# Altium PCB HiSpeedADC.PcbDoc
Units mil, origin at the board's own origin, x right, y up, seen from the top; angles counter-clockwise.
Board outline 1590 x 2280 mil, 2 copper layers (Top Layer, Bottom Layer); 47 components, 36 nets, 169 pads, 22 vias.
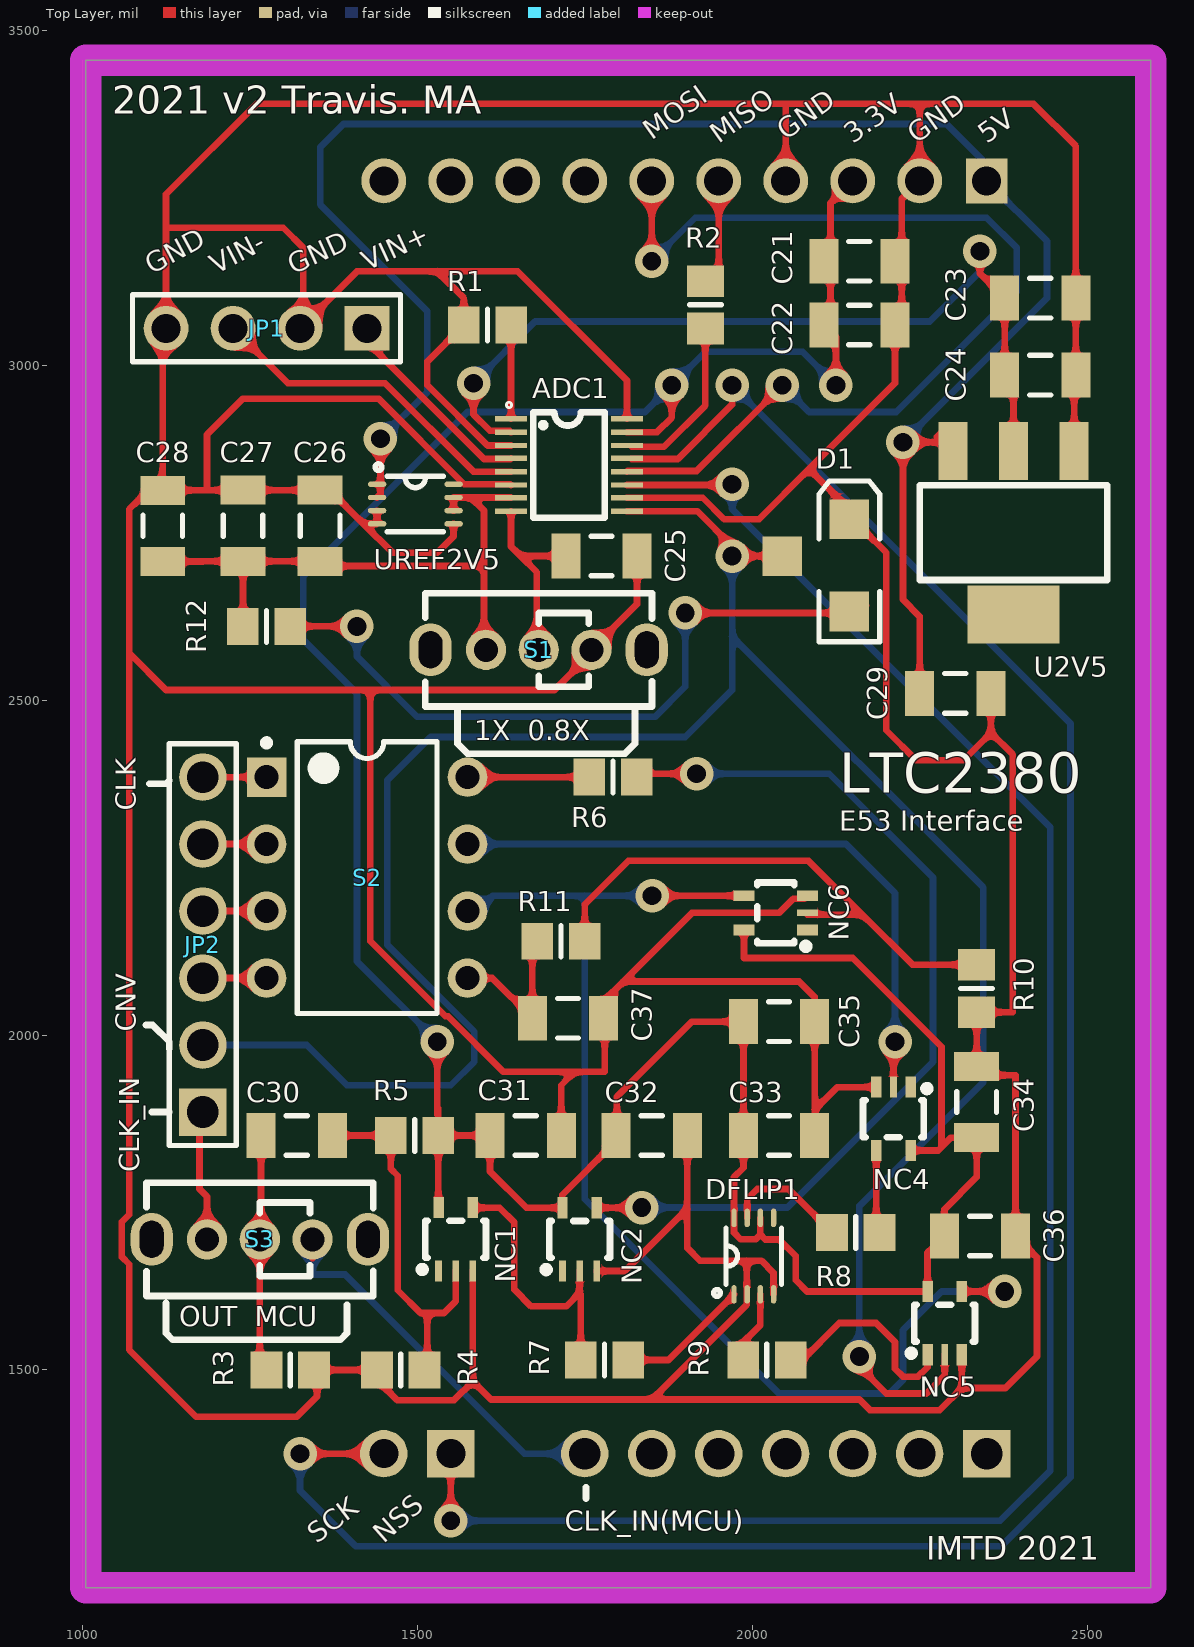
[diagram p0: Top Layer view]
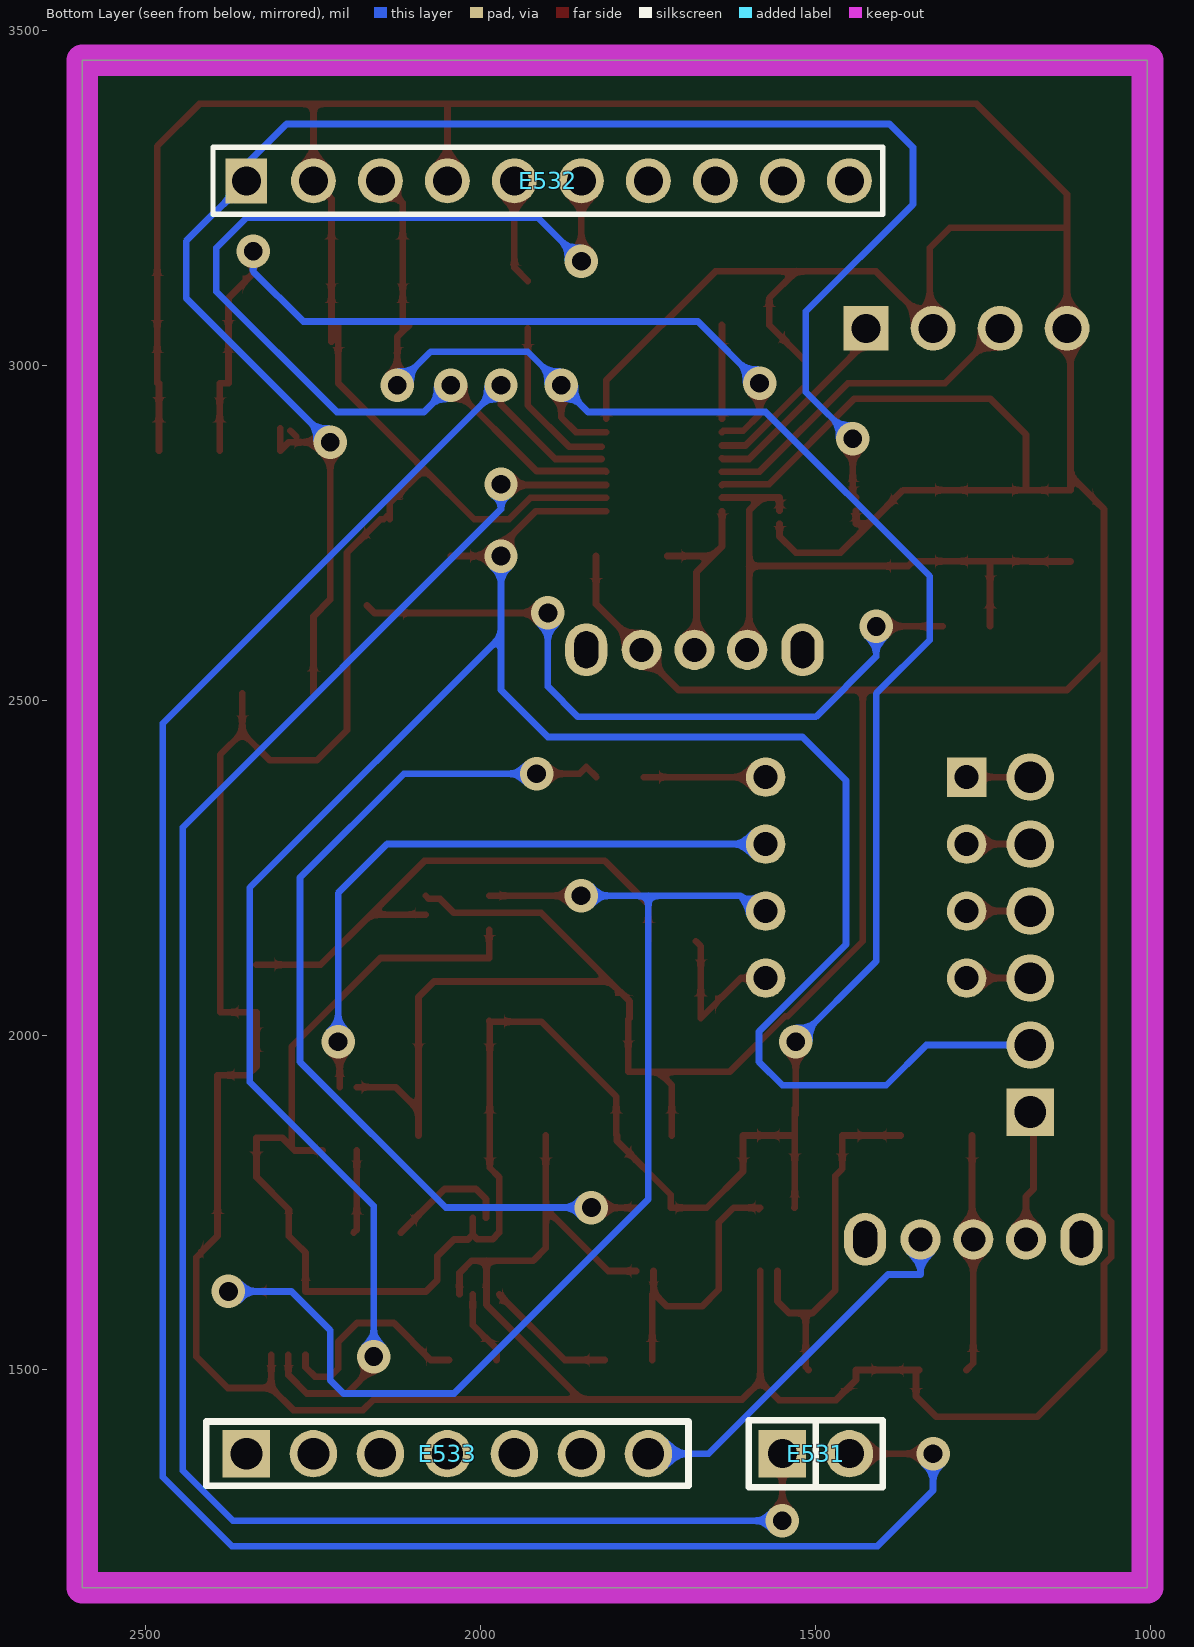
[diagram p1: Bottom Layer view, seen from below]

## Layer stack, top to bottom
Top Solder: solder mask 0.4, Solder Resist, Dk 3.5
Top Layer: signal copper 1.4
Dielectric 1: dielectric 12.6, FR-4, Dk 4.8
Bottom Layer: signal copper 1.4
Bottom Solder: solder mask 0.4, Solder Resist, Dk 3.5

## Board outline
1005,1175 1005,3455 2595,3455 2595,1175

## Design rules (kind name [scope] priority, off if disabled: settings)
Clearance [All] p1: gap=8 ignorepadtopadclearanceinfootprint=TRUE except(0: Via-Hole Fill-Hole Poly-Hole Region-Hole Text-Hole)
PolygonConnect [All] p1: connectstyle=Relief reliefconductorwidth=10 reliefentries=4 polygonreliefangle="90 Angle" airgapwidth=10
RoomDefinition HiSpeedADC [InComponentClass('HiSpeedADC')] p1: confinementstyle=ConfineIn formatcopy=TRUE lockcomponents=FALSE outline 1000,1175 2550,1175 2550,3450 1000,3450
RoutingVias [All] p1: holewidth=28 width=50 viastyle="Through Hole" minholewidth=28 minwidth=50 maxholewidth=28 maxwidth=50
SolderMaskExpansion [All] p1: expansion=4
Width [All] p1: maxlimit=10 minlimit=10 preferedwidth=10
30 further rules are at their usual default settings.

## Components (designator, comment, footprint, x,y, rotation, side; value= is the part's Value field where it differs from the comment)
ADC1 "LTC2380IMS-24#PBF" MSOP-16_L4.0-W3.0-P0.50-LS4.9-BL 1726.5,2855.75 r270 top
C21 "" C1206 2160,3155 r0 top value=10uF
C22 "" C1206 2160,3060 r0 top value=0.1uF
C23 "" C1206 2430,3100 r0 top value=10uF
C24 "" C1206 2430,2985 r0 top value=0.1uF
C25 "" C1206 1775,2715 r0 top value=0.1uF
C26 "" C1206 1355,2760.25 r90 top value=47uF
C27 "" C1206 1240,2760.25 r90 top value=2.2uF
C28 "" C1206 1120,2760 r90 top value=0.1uF
C29 "" C1206 2303.15,2510 r0 top value=0.1uF
C30 "" C1206 1320,1850 r0 top value=0.1uF
C31 "" C1206 1661.85,1850 r180 top value=0.1uF
C32 "" C1206 1850,1850 r180 top value=0.1uF
C33 "" C1206 2040,1850 r0 top value=0.1uF
C34 "" C1206 2335,1900 r90 top value=0.1uF
C35 "" C1206 2040,2020 r180 top value=0.1uF
C36 "" C1206 2340,1700 r0 top value=0.1uF
C37 "" C1206 1725,2025 r0 top value=0.1uF
D1 "LED2" 3.2X1.6X1.1 2145,2701.1 r90 top
DFLIP1 "NL17SZ74" US-8_L2.4-W2.1-P0.50-LS3.2-BR 1995,1670 r270 top
E531 "A2541WV-2P" HDR-TH_P2.54-H-M_A2541WV-2P 1500,1375 r180 bottom locked
E532 "10P-2.54" HDR-TH_10P-P2.54-V 1900,3275 r180 bottom locked
E533 "A2541WV-7P" HDR-TH_7P-P2.54-V 2049.92,1375 r180 bottom locked
JP1 "2P-2.54" HDR-TH_4P-P2.54-V 1275,3055 r180 top
JP2 "6P-2.54" HDR-TH_6P-P2.54-V 1180,2135 r90 top
NC1 "NC7SZ04P5X" SC-70-5_L2.1-W1.3-P0.65-LS2.1-BR#1 1555,1695 r270 top
NC2 "NC7SVU04P5X" SC-70-5_L2.1-W1.3-P0.65-LS2.1-BL#1 1740,1694.86 r0 top
NC4 "NC7SVU04P5X" SC-70-5_L2.1-W1.3-P0.65-LS2.1-BL#2 2213.15,1875 r180 top
NC5 "NC7SZ66P5X" SC-70-5_L2.1-W1.3-P0.65-LS2.1-BL#2 2285,1570 r0 top
NC6 "NC7SZ04P5X" SC-70-5_L2.1-W1.3-P0.65-LS2.1-BR#2 2035,2180 r0 top
R1 "" 6-0805_N 1605,3060 r0 top value=1K
R2 "" 6-0805_N 1930,3090 r270 top value=33
R3 "" 6-0805_N 1310.43,1500 r0 top value=49.9
R4 "" 6-0805_N 1475.43,1500 r180 top value=1k
R5 "" 6-0805_N 1496.07,1850 r180 top value=1k
R6 "" 6-0805_N 1792.24,2385 r0 top value=33
R7 "" 6-0805_N 1779.57,1515 r180 top value=33
R8 "" 6-0805_N 2154.57,1705 r180 top value=33
R9 "" 6-0805_N 2021.85,1515 r0 top value=33
R10 "" 6-0805_N 2335,2069.57 r90 top value=2k
R11 "" 6-0805_N 1714.57,2140 r180 top value=1k
R12 "" 6-0805_N 1275,2610 r180 top value=1k
S1 "SS12D07" SW-TH_SS-12D07-X-X 1681.26,2575 r180 top
S2 "SW-DIP4" DIP-8 1425,2235 r0 top
S3 "SS12D07" SW-TH_SS-12D07-X-X 1265,1695 r180 top
U2V5 "AMS1117-2.5v" SOT-223_L6.7-W3.5-P2.30-BR 2390,2750 r90 top
UREF2V5 "LTC6655MS8-2.5" US-8_L2.4-W2.1-P0.50-LS3.2-BR 1497.09,2800 r180 top

## Footprints (in the part's own frame and the unit in brackets; to place one, negate y for a bottom-side part, rotate by r counter-clockwise, add the part's x,y. Pads: shape width x height; smd on the part's side, far side on the other; paste and mask are expansions set on the pad)
3.2X1.6X1.1 [mm] "SMT LED; 2 Flat Leads"
  rect 1.5x1.5 smd: 1(-1.75,0) 2(1.75,0)
  silkscreen extent -2.9,-1.15 3.2,1.15
6-0805_N [mm] "Chip Resistor, Body 2.0x1.2mm, IPC Medium Density"
  rect 1.2x1.4 smd: 1(-0.9,0) 2(0.9,0)
  silkscreen extent 0,-0.6 0,0.6, body extent -1.07,-0.7 1.07,0.7, height 0.7
C1206 [mm] "Chip Capacitor, Body 3.2x1.6mm, IPC High Density"
  rect 1.1x1.7 smd: 1(-1.35,0) 2(1.35,0)
  silkscreen extent -0.4,-0.75 0.4,0.75, body extent -1.7,-0.9 1.7,0.9, height 1.3
DIP-8 [mm] "DIP; 8 Leads; Row Spacing 7.62 mm; Pitch 2.54 mm"
  rect 1.5x1.5 hole 0.9: 1(-3.81,3.81)
  round 1.5 hole 0.9: 2(-3.81,1.27) 3(-3.81,-1.27) 4(-3.81,-3.81) 5(3.81,-3.81) 6(3.81,-1.27) 7(3.81,1.27) 8(3.81,3.81)
  silkscreen extent -3.93,-5.15 2.65,5.23, body extent -3.6,-5.15 3.6,5.15, height 5.08
HDR-TH_4P-P2.54-V [mm]
  rect 1.7x1.7 hole 1.1: 1(-3.81,0)
  round 1.7 hole 1.1: 2(-1.27,0) 3(1.27,0) 4(3.81,0)
  silkscreen extent -5.08,-1.27 5.08,1.27
HDR-TH_6P-P2.54-V [mm]
  rect 1.8x1.8 hole 1.2: 1(-6.35,0)
  round 1.8 hole 1.2: 2(-3.81,0) 3(-1.27,0) 4(1.27,0) 5(3.81,0) 6(6.35,0)
  silkscreen extent -7.62,-1.27 7.62,1.27
HDR-TH_7P-P2.54-V [mm]
  rect 1.8x1.8 hole 1.2: 1(-7.622,0)
  round 1.8 hole 1.2: 2(-5.082,0) 3(-2.542,0) 4(-0.002,0) 5(2.538,0) 6(5.078,0) 7(7.618,0)
  silkscreen extent -9.14,-1.22 9.14,1.22
HDR-TH_10P-P2.54-V [mm]
  rect 1.575x1.7 hole 1.1: 1(-11.43,0)
  round 1.7 hole 1.1: 2(-8.89,0) 3(-6.35,0) 4(-3.81,0) 5(-1.27,0) 6(1.27,0) 7(3.81,0) 8(6.35,0) 9(8.89,0) 10(11.43,0)
  silkscreen extent -12.7,-1.27 12.7,1.27
HDR-TH_P2.54-H-M_A2541WV-2P [mm]
  rect 1.8x1.8 hole 1.1: 1(-1.27,0)
  round 1.8 hole 1.1: 2(1.27,0)
  silkscreen extent -2.54,-1.27 2.54,1.27
MSOP-16_L4.0-W3.0-P0.50-LS4.9-BL [mil]
  rect 8x47.24 smd: 1(-64.25,-86.5) 2(-44.25,-86.5) 3(-24.25,-86.5) 4(-5.25,-86.5) 5(14.75,-86.5) 6(34.75,-86.5) 7(53.75,-86.5) 8(73.75,-86.5) 9(73.75,86.5) 10(53.75,86.5) 11(34.75,86.5) 12(14.75,86.5) 13(-5.25,86.5) 14(-24.25,86.5) 15(-44.25,86.5) 16(-64.25,86.5)
  silkscreen extent -89,-93 84,53
SC-70-5_L2.1-W1.3-P0.65-LS2.1-BL#1 [mm]
  rect 0.254x0.8 smd: 1(-0.59,-1.2) 2(0.06,-1.2) 3(0.71,-1.2)
  rect 0.381x0.8 smd: 4(0.71,1.2) 5(-0.59,1.2)
  silkscreen extent -1.34,-1.27 1.21,0.7
SC-70-5_L2.1-W1.3-P0.65-LS2.1-BL#2 [mm]
  rect 0.4x0.8 smd: 1(-0.59,-1.2) 3(0.71,-1.2) 4(0.71,1.2) 5(-0.59,1.2)
  rect 0.254x0.8 smd: 2(0.06,-1.2)
  silkscreen extent -1.34,-1.27 1.21,0.7
SC-70-5_L2.1-W1.3-P0.65-LS2.1-BR#1 [mm]
  rect 0.8x0.254 smd: 1(1.2,-0.59) 2(1.2,0.06) 3(1.2,0.71)
  rect 0.8x0.4 smd: 4(-1.2,0.71) 5(-1.2,-0.59)
  silkscreen extent -0.7,-1.34 1.27,1.21
SC-70-5_L2.1-W1.3-P0.65-LS2.1-BR#2 [mm]
  rect 0.8x0.4 smd: 1(1.2,-0.59) 3(1.2,0.71) 4(-1.2,0.71) 5(-1.2,-0.59)
  rect 0.8x0.254 smd: 2(1.2,0.06)
  silkscreen extent -0.7,-1.34 1.27,1.21
SOT-223_L6.7-W3.5-P2.30-BR [mm]
  rect 2.2x1.1 smd: 1(3.099,-2.3) 2(3.099,0) 3(3.099,2.3)
  rect 2.2x3.5 smd: 4(-3.099,0)
  silkscreen extent -1.8,-3.55 1.8,3.55
SW-TH_SS-12D07-X-X [mil]
  round 60 hole 36: 1(-78.74,0) 2(0,0) 3(78.74,0)
  oval 62.99x78.74 hole 35.43 slot 55.12 at 90 deg: EH(-161.42,0) EH(161.42,0)
  silkscreen extent -169,-85 169,85
US-8_L2.4-W2.1-P0.50-LS3.2-BR [mm]
  oval 0.7x0.203 smd: 1(1.45,-0.563) 2(1.45,-0.063) 3(1.45,0.437) 4(1.45,0.937) 5(-1.45,0.937) 6(-1.45,0.437) 7(-1.45,-0.063) 8(-1.45,-0.563)
  silkscreen extent -1.06,-1.34 1.52,1.24

## Part data
C21 C22 C23 C24 C25 C26 C27 C28 C29 C30 C31 C32 C33 C34 C35 C36 C37: library part "Cap Semi", "Capacitor (Semiconductor SIM Model)", LatestRevisionDate=29-May-2009, LatestRevisionNote="IPC-7351 Footprint Added.", PackageDescription="Chip Capacitor", PackageReference=C1206, Published=8-Jun-2000, Publisher="Altium Limited"
D1: "Typical RED, GREEN, YELLOW, AMBER GaAs LED", LatestRevisionDate=17-Jul-2002, LatestRevisionNote="Re-released for DXP Platform.", PackageDescription="SM LED; 2 Flat Leads", PackageReference=3.2X1.6X1.1, PackageVersion=Feb-2002, Published=8-Jun-2000, Publisher="Altium Limited"
R1 R2 R3 R4 R5 R6 R7 R8 R9 R10 R11 R12: library part Res2, "Resistor", LatestRevisionDate=17-Jul-2002, LatestRevisionNote="Re-released for DXP Platform.", PackageDescription="Axial Device, Thru-Hole; 2 Leads; 0.4 in Pin Spacing", PackageReference=AXIAL-0.4, Published=8-Jun-2000, Publisher="Altium Limited"
S2: "DIP Switch", LatestRevisionDate=17-Jul-2002, LatestRevisionNote="Re-released for DXP Platform.", PackageReference=DIP-8, Published=24-Mar-1999, Publisher="Altium Limited"
U2V5: library part AMS1117-ADJ, BOM_JLCPCB SMD=Yes, BOM_Manufacturer=AMS, BOM_Manufacturer Part=AMS1117-ADJ, BOM_Supplier=LCSC, BOM_Supplier Part=C6188, Contributor=GerryChen, image=//image.lceda.cn/szlcsc/C6188.jpg, SMT Type=Extend, sourceId=0btnFXRxP, spicePre=U, spiceSymbolName=AMS1117-ADJ
UREF2V5: library part LTC6655MS8-5

## Free pads (board coordinates)
  rect 59.06x59.06 smd: 2(2045,2715)

## Via types
v1: diameter 50, hole 28, Top Layer to Bottom Layer, 22 vias

## Nets (pads, with @x,y where several pads share a name; then routed paths per layer and width w, separated by ;. In a path a pad name is that pad's centre, name@x,y a point inside that pad or via, vN(x,y) a via of type N, cw(c..) or ccw(c..) an arc to the next point about the centre after c; other vN are vias at no path point)
CLK: R6.1 S2.8 | length 181.8
  Top Layer w10: S2.8 R6.1
CLK_IN: E533.7 S3.1 | length 597.8
  Top Layer w10: S3.1@1343.74,1666.69 S3.1
  Bottom Layer w10: S3.1 1343.74,1642.63 1392.37,1642.63 1660,1375 E533.7
CNV: ADC1.9 JP2.2 NC5.2 pad.2 | length 3495.3
  Top Layer w10: ADC1.9 1918,2782 1970,2730 v1(1970,2715) pad.2 ; v1(2160,1520) 2160,1505 2200,1465 2260,1465 2287.36,1492.36 NC5.2
  Bottom Layer w10: JP2.2@1150,1985 1335,1985 1395,1925 1550,1925 1585,1960 1585,2005 1455,2135 1455,2380 1520,2445 1900,2445 1970,2515 1970,2595 ; v1(1970,2715) 1970,2595 ; v1(2160,1520) 2160,1745 2345,1930 2345,2220 1970,2595
CNVST_33: NC4.2 S2.7 | length 959
  Top Layer w10: NC4.2 2210.79,1987.64 v1(2213.15,1990)
  Bottom Layer w10: S2.7 2140,2285 2213.15,2211.85 v1(2213.15,1990)
D2V5: ADC1.2 C23.1 C24.1 U2V5.2 | length 1295.1
  Top Layer w10: v1(1584,2973) 1584,2926.46 1608.46,2902 1638,2902 ADC1.2 ; v1(2340,3170) 2340,3136.85 C23.1 C24.1 2376.85,2973 2390,2973 U2V5.2
  Bottom Layer w10: v1(1584,2973) 1676,3065 2265,3065 2340,3140 v1(2340,3170)
D3V3: ADC1.15 C21.1 C22.1 C31.2 C32.2 C33.1 C34.1 C35.2 C36.1 DFLIP1.6 DFLIP1.8 E532.3 NC1.5 NC2.5 NC4.5 NC5.5 NC6.5 R5.1 | length 4755.2
  Top Layer w10: v1(1530,1990) 1530,1881.5 1531.5,1880 ; 1531.5,1890.75 1531.5,1880 ; NC1.5 1531.5,1742.52 R5.1 ; ADC1.15 1858,2900 1880,2922 v1(1880,2970) ; C35.2@1987.76,2020.91 C35.2 ; NC6.5 1987.76,2115 2150,2115 2282.5,1982.5 2282.5,1832.5 ; DFLIP1.6 2012.2,1702.06 ; C22.1 C22.1@2116.85,3050 ; v1(2125,2970) 2125,3041.85 C22.1@2116.85,3050 ; E532.3 2116.85,3241.85 2116.85,3155 C22.1@2116.85,3050 ; NC4.5 2277.76,1827.76 2282.5,1832.5 ; R5.1 C31.2 1608.7,1796.3 1662.9,1742.1 1716.6,1742.1 1716.6,1761.6 1796.85,1841.85 C32.2 1798,1851.15 1798,1908 1910,2020 C35.2 ; R5.1 1531.5,1880 ; C35.2 C33.1 1986.85,1801.85 1972.83,1787.83 DFLIP1.8 1972.83,1705 1982.83,1695 2005.14,1695 2012.2,1702.06 ; 2012.2,1702.06 2019.4,1694.86 2040.14,1694.86 2065,1670 2065,1634.09 2081.84,1617.24 NC5.5 2261.77,1674.92 C36.1 2286.85,1739.68 2335,1787.83 C34.1 2296.85,1846.85 2282.5,1832.5
  Bottom Layer w10: v1(1530,1990) 1410,2110 1410,2509.54 1330,2589.54 1330,2685 1575,2930 1840,2930 v1(1880,2970) 1930,3020 2075,3020 v1(2125,2970)
D5V0: C29.1 E532.1 U2V5.3 UREF2V5.1 UREF2V5.2 | length 2707
  Top Layer w10: UREF2V5.2 1445,2807.48 v1(1445,2890) ; C29.1 2250,2625 2225,2650 v1(2225,2885) 2286.45,2885 U2V5.3 U2V5.3@2299.45,2905.55 ; 2275.45,2893 U2V5.3@2284.45,2902
  Bottom Layer w10: v1(1445,2890) 1515,2960 1515,3080 1355,3240 1355,3325 1390,3360 2290,3360 2350,3300 E532.1 2440,3185 2440,3100 v1(2225,2885)
GND: ADC1.3 ADC1.6 ADC1.10 ADC1.16 C21.2 C22.2 C23.2 C24.2 C25.2 C26.2 C27.2 C28.2 C29.2 C31.1 C32.1 C33.2 C34.2 C35.1 C36.2 C37.2 D1.2 DFLIP1.2 DFLIP1.4 E532.2 E532.4 JP1.2 JP1.4 NC1.3 NC2.3 NC4.3 NC5.3 NC6.3 R1.1 R3.2 R4.2 R10.1 S1.1 U2V5.1 UREF2V5.3 UREF2V5.4 UREF2V5.5 UREF2V5.8 | length 14460.1
  Top Layer w10: JP1.2 JP1.2@1330,3060 ; R3.2 R3.2@1350.43,1500 ; UREF2V5.3 UREF2V5.4 1420,2763.11 ; UREF2V5.5 1554.18,2744.18 1530,2720 1463.11,2720 1420,2763.11 ; NC1.3 1582.95,1482.95 ; ADC1.6 1638.83,2822.17 1570,2822.17 1442.17,2950 1240,2950 1186.26,2896.26 1186.26,2813.4 ; ADC1.3 1605,2880 1515,2970 1515,3005.43 R1.1 1569.57,3100 1529.57,3140 ; C31.1 1715,1925 1735,1945 ; S1.1 1828.15,2643.15 C25.2 ; S1.1@1760,2582.02 1757.02,2585 1757.02,2567.02 1705,2515 1430,2515 ; NC2.3 1809.86,1647.61 1903.15,1740.91 ; ADC1.10 1926.11,2802 1958.11,2770 2010,2770 2085,2845 ; ADC1.16 1813,2977 1650,3140 1529.57,3140 ; C32.1 1903.15,1740.91 ; DFLIP1.4 2031.89,1644.96 2013.59,1663.26 1991.74,1663.26 ; E532.4 2050,3390 ; NC6.3 2077.53,2203.24 2061.11,2203.24 2040.24,2182.36 1910,2182.36 1807.64,2080 ; C33.2 2093.15,1888.15 ; D1.2@2140.55,2774.45 2136.1,2770 2136.1,2793.9 2085,2845 ; D1.2 2150,2770 2200,2720 2200,2455 2245,2410 2315,2410 2356.3,2451.3 ; NC4.3 2127.24,1922.24 2093.15,1888.15 ; C22.2 2213.15,2973.15 2085,2845 ; C22.2@2223.15,3035 2223.15,3248.15 E532.2 2250,3390 ; NC5.3 2312.95,1472.95 ; C29.2 2356.3,2451.3 ; U2V5.1 2480.55,2973 2483.15,2973 C24.2 C23.2 2483.15,3326.85 2420,3390 2250,3390 ; 1070,2570 1070,1732.22 1059.09,1721.3 1059.09,1668.7 1070,1657.78 1070,1530 1170,1430 1320,1430 1350.43,1460.43 R3.2@1350.43,1500 ; 1070,2570 1070,2785 1120,2835 ; 1070,2570 1125,2515 1430,2515 ; 1120,2835 1120,3050 JP1.4 1125,3205 ; 1120,2835 C28.2 1180,2813.15 1180.25,2813.4 1186.26,2813.4 ; 1125,3205 1125,3255 1260,3390 2050,3390 ; 1125,3205 1300,3205 1330,3175 JP1.2@1330,3060 ; 1186.26,2813.4 C27.2 C26.2 1369.71,2813.4 1420,2763.11 ; JP1.2@1330,3060 1410,3140 1529.57,3140 ; R3.2@1350.43,1500 R4.2 1440,1485 1470,1455 1555,1455 1582.95,1482.95 ; 1430,2515 1430,2140 1542,2028 1545.74,2028 1628.74,1945 1735,1945 ; 1582.95,1482.95 1610,1455.91 1850.44,1455.91 ; 1735,1945 1780,1945 1780,2023.15 C37.2 1778.15,2050.51 1807.64,2080 ; 1807.64,2080 2070,2080 2093.15,2056.85 C35.1 2093.15,1888.15 ; 1850.44,1455.91 2160,1455.91 2175.91,1440 2280,1440 2312.95,1472.95 ; 1850.44,1455.91 1991.74,1597.21 1991.74,1663.26 ; 1903.15,1740.91 1903.15,1681.85 1921.74,1663.26 1991.74,1663.26 ; 2050,3390 2250,3390 ; 2312.95,1472.95 2377.95,1472.95 2425,1520 2425,1668.15 C36.2 2393.15,1940 2348.15,1940 C34.2 R10.1 2389.13,2034.13 2389.13,2418.47 2356.3,2451.3
J3-2: C37.1 R11.2 S2.5 | length 239.7
  Top Layer w10: S2.5 1611.85,2085 C37.1 1671.85,2132.72 R11.2
MISO: E532.5 R2.1 | length 157.9
  Top Layer w10: R2.1 1950,3145.43 E532.5
MOSI: ADC1.12 E532.6 | length 1502.1
  Top Layer w10: ADC1.12 1814,2842 1917,2842 v1(2045,2970) ; v1(1850,3155) E532.6
  Bottom Layer w10: v1(1850,3155) 1915,3220 2350,3220 2395,3175 2395,3110 2215,2930 2085,2930 v1(2045,2970)
NetADC1_1: ADC1.1 R1.2 | length 140.2
  Top Layer w10: ADC1.1 1640,3059.57 R1.2
NetADC1_14: ADC1.14 R2.2 | length 250.2
  Top Layer w10: ADC1.14@1820,2878 1868,2878 1930,2940 R2.2
NetC30_1: C30.1 R3.1 S3.2 | length 374.2
  Top Layer w10: S3.2 S3.2@1265,1675 ; C30.1 1266.85,1696.85 1266.68,1694.86 S3.2@1265,1675 ; R3.1 1265,1510 S3.2@1265,1675
NetC30_2: C30.2 NC1.2 R4.1 R5.2 | length 562.5
  Top Layer w10: C30.2 R5.2 1460.63,1800.28 1470.91,1790 1470.91,1619.09 1505,1585 1515,1585 ; R4.1 1515,1504.13 1515,1585 ; NC1.2 1557.36,1602.36 1540,1585 1515,1585
NetD1_1: D1.1 R12.1 | length 1075.1
  Top Layer w10: R12.1 v1(1410,2610) ; v1(1900,2630) 2158.9,2630 D1.1@2170,2641.1
  Bottom Layer w10: v1(1410,2610) 1410,2565 1500,2475 1855,2475 1900,2520 v1(1900,2630)
NetDFLIP1_1: DFLIP1.1 R7.1 | length 198.4
  Top Layer w10: R7.1 1874.92,1515 DFLIP1.1
NetDFLIP1_3: DFLIP1.3 R9.1 | length 112.6
  Top Layer w10: R9.1@1976.77,1515 1976.77,1531.77 2012.2,1567.2 DFLIP1.3
NetDFLIP1_7: DFLIP1.7 R8.2 | length 187.7
  Top Layer w10: DFLIP1.7 1992.52,1755 2007.52,1770 2054.13,1770 R8.2
NetJP2_1: JP2.1 S3.3 | length 205
  Top Layer w10: JP2.1@1150,1885 1175,1860 1175,1770 1186.26,1758.74 S3.3
NetJP2_3: JP2.3 S2.4 | length 125
  Top Layer w10: JP2.3@1150,2085 S2.4
NetJP2_4: JP2.4 S2.3 | length 125
  Top Layer w10: JP2.4@1150,2185 S2.3
NetJP2_5: JP2.5 S2.2 | length 125
  Top Layer w10: JP2.5@1150,2285 S2.2
NetJP2_6: JP2.6 S2.1 | length 125
  Top Layer w10: JP2.6@1150,2385 S2.1
NetNC1_4: NC1.4 NC2.2 R7.2 | length 423.8
  Top Layer w10: NC1.4@1585.2,1740 NC1.4 1622.76,1742.24 1645,1720 1645,1620 1670,1595 1722.36,1595 1742.36,1615 ; NC2.2 1742.36,1615 ; R7.2 1744.13,1613.23 1742.36,1615
NetNC2_4: NC2.4 R6.2 | length 1384.2
  Top Layer w10: NC2.4 1834.59,1742.1 v1(1835,1742.52) ; R6.2 1842.68,2400 1852.68,2390 v1(1917,2390)
  Bottom Layer w10: v1(1835,1742.52) 2052.52,1742.52 2270,1960 2270,2235 2115,2390 v1(1917,2390)
NetNC4_4: NC4.4 R8.1 | length 124.7
  Top Layer w10: NC4.4 2185.2,1709.8 R8.1
NetNC5_1: NC5.1 R9.2 | length 318
  Top Layer w10: R9.2@2047.63,1515 2075,1515 2130,1570 2185,1570 2213.15,1541.85 2213.15,1501.85 2225,1490 2247.64,1490 2261.77,1504.13 NC5.1
NetNC6_2: NC6.2 R10.2 R11.1 | length 813.9
  Top Layer w10: R11.1 1750,2195 1815,2260 2084.06,2260 2164.33,2179.72 ; NC6.2@2082.24,2179.72 2164.33,2179.72 ; 2165,2179.72 2164.33,2179.72 ; R10.2 2239.06,2105 2164.33,2179.72
NSS: ADC1.11 E531.1 | length 2873.7
  Top Layer w10: E531.1@1535,1390 E531.1 v1(1550,1275) ; ADC1.11 1968.83,2821 v1(1970,2822.17)
  Bottom Layer w10: v1(1550,1275) 2370,1275 2445,1350 2445,2310 1970,2785 v1(1970,2822.17)
QuikEval_DETECT: NC5.4 NC6.4 S2.6 | length 1792.8
  Top Layer w10: v1(1850.44,2207.95) NC6.4 ; NC5.4 v1(2376.85,1617.24)
  Bottom Layer w10: S2.6 1590,2185 1612.95,2207.95 1750,2207.95 ; v1(1850.44,2207.95) 1750,2207.95 ; v1(2376.85,1617.24) 2282.76,1617.24 2225,1559.49 2225,1485 2205,1465 2040,1465 1750,1755 1750,2207.95
SCK: ADC1.13 E531.2 | length 3458.8
  Top Layer w10: v1(1325,1375) E531.2 ; ADC1.13@1820,2860 1889,2860 1970,2941 v1(1970,2970)
  Bottom Layer w10: v1(1325,1375) 1325,1320 1408,1237 2372,1237 2475,1340 2475,2465 v1(1970,2970)
VINN: ADC1.5 JP1.3 | length 503.6
  Top Layer w10: JP1.3 1307,2973 1452,2973 1584,2841 ADC1.5
VINP: ADC1.4 JP1.1 | length 308.2
  Top Layer w10: JP1.1 1425,3034.54 1599.54,2860 1639,2860 ADC1.4
VREF2V5: ADC1.7 C26.1 C27.1 C28.1 R12.2 S1.3 UREF2V5.6 UREF2V5.7 | length 908.2
  Top Layer w10: C28.1 1180,2706.85 1180.25,2707.1 C27.1 ; R12.2 1240,2610.43 C27.1 ; UREF2V5.6 UREF2V5.7 ; UREF2V5.7@1557.09,2802.48 1580,2802.48 ; S1.3@1599.54,2585 1599.54,2700 ; ADC1.7 1639.52,2802.48 1580,2802.48 ; C27.1 C26.1 1362.1,2700 1599.54,2700 ; 1580,2802.48 1599.54,2782.93 1599.54,2700
VREF/DGC: ADC1.8 C25.1 S1.2 | length 280.5
  Top Layer w10: ADC1.8 1640,2729.18 1654.18,2715 ; S1.2@1678.28,2585 1678.28,2690.89 1654.18,2715 ; C25.1 1654.18,2715
pads on no net: DFLIP1.5 E532.7 E532.8 E532.9 E532.10 E533.1 E533.2 E533.3 E533.4 E533.5 E533.6 NC1.1 NC2.1 NC4.1 NC6.1 S1.EH S3.EH U2V5.4

## Polygon pours and split planes (outlines as drawn)
no net on Top Overlay (solid, shelved): 1180,1290
no net on Top Overlay (solid, shelved): 1210,1110
GND on Top Layer "Top Layer-No Net" (solid, remove dead copper, shelved, pour order 11): 1000,1175 2595,1175 2595,3455 1000,3455

## Keep-outs
Keep-Out Layer:
  the board outline again, w47.24

## Silkscreen, mask and mechanical layers (free items; w line width, h text height)
Top Overlay:
  lines w10: 1095,2015 1105,2015 1130,1990 1130,1980 ; 1100,2375 1125,2375 1130,2380 ; 1103.58,1885 1130,1885 ; 1125,1600 1125,1555 1135,1545 1385,1545 1395,1555 1395,1597.56 ; 1560,2490.35 1560,2435 1575,2420 1810,2420 1825,2435 1825,2490.35 ; 1751.89,1308.11 1751.89,1325
  text "2021 v2 Travis. MA" at 1045,3375 h42
  text "MOSI" at 1850,3335 h30 r35.31
  text "GND" at 2050,3335 h30 r35.31
  text "MISO" at 1950,3330 h30 r35.31
  text "3.3V" at 2150,3330 h30 r35.31
  text "GND" at 2245,3330 h30 r35.31
  text "5V" at 2350,3330 h30 r35.31
  text "VIN+" at 1425,3140 h30 r24.88
  text "GND" at 1103.58,3135 h30 r28.44
  text "VIN-" at 1200,3135 h30 r27.47
  text "GND" at 1315,3135 h30 r24.62
  text "1X  0.8X" at 1585,2440 h30
  text "LTC2380" at 2130,2361.38 h60
  text "CLK" at 1080,2335 h30 r90
  text "E53 Interface" at 2130,2305 h30
  text "CNV" at 1080,2005 h30 r90
  text "CLK_IN" at 1085,1795 h30 r90
  text "OUT  MCU" at 1145,1565 h30
  text "CLK_IN(MCU)" at 1720,1260 h30
  text "SCK" at 1350,1240 h30 r37.08
  text "NSS" at 1450,1240 h30 r41.42
  text "IMTD 2021" at 2260,1205 h60